# Altium PCB KL25_1.PcbDoc
Units mm, origin at the board's own origin, x right, y up, seen from the top; angles counter-clockwise.
Board outline 152.4 x 101.6 mm, 2 copper layers (Top Layer, Bottom Layer); 44 components, 80 nets, 206 pads, 22 vias.
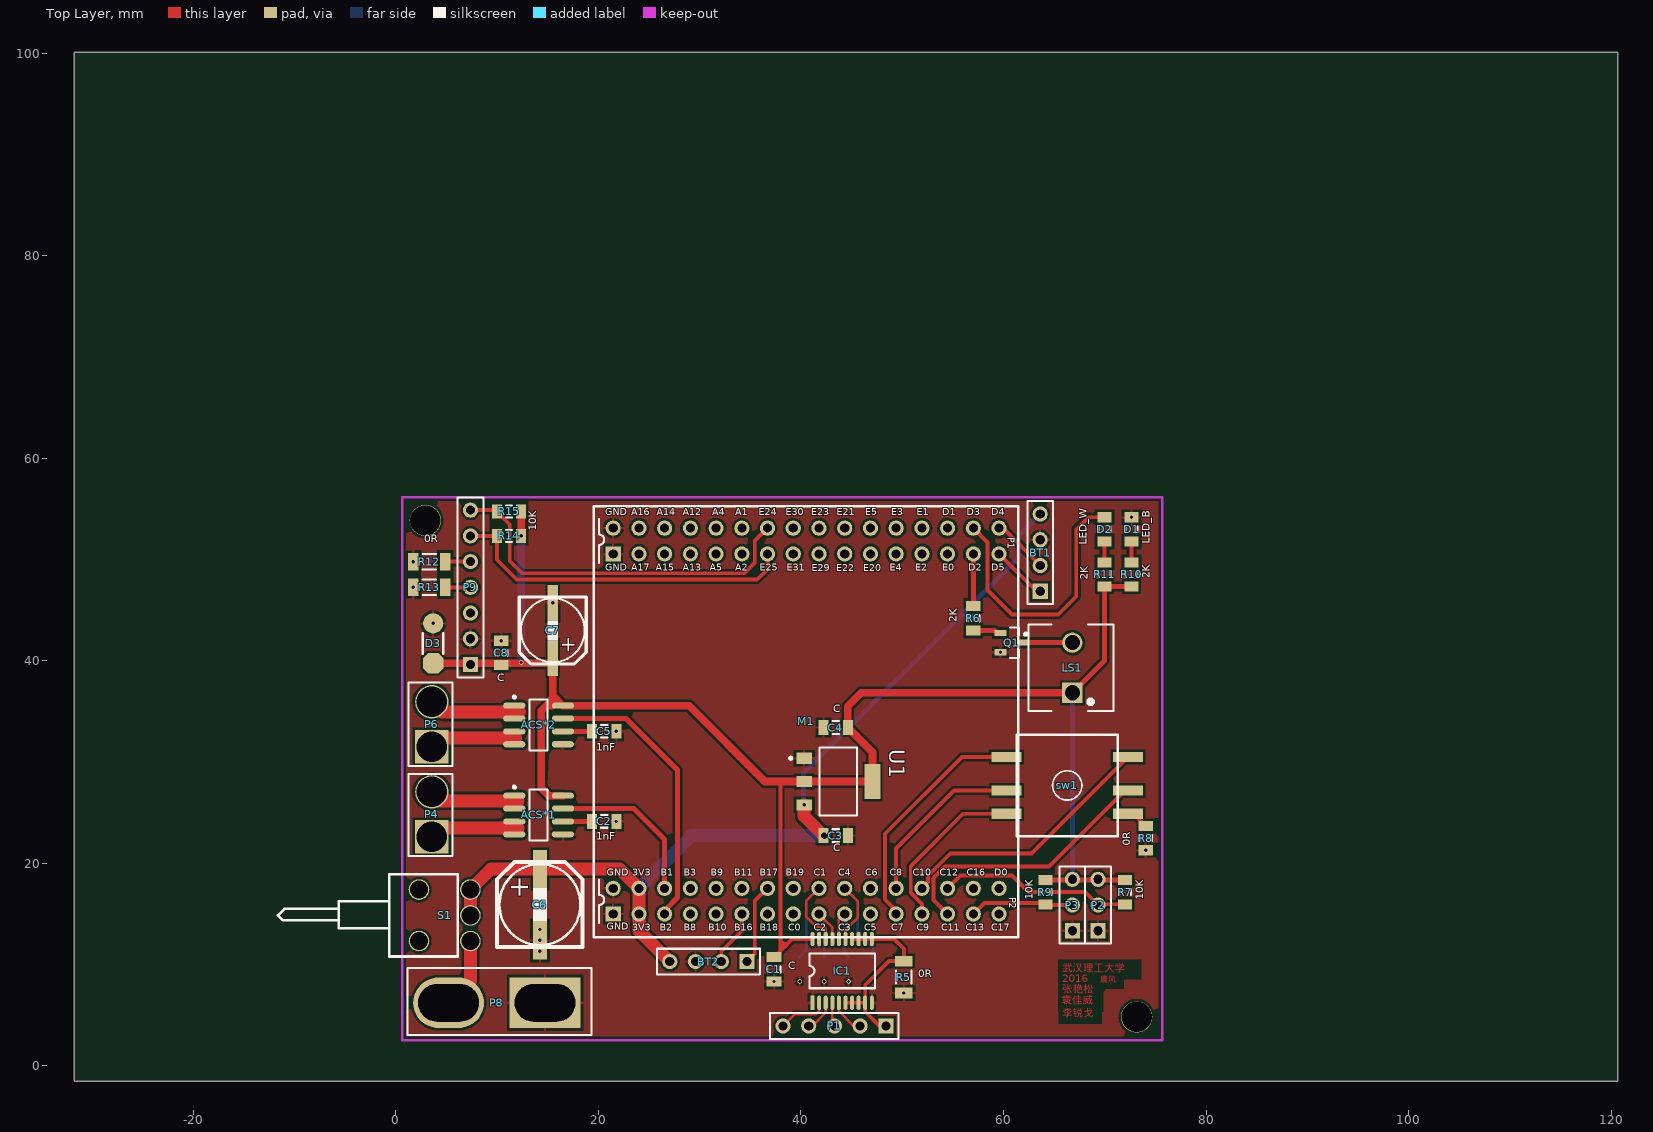
[diagram p0: Top Layer view]
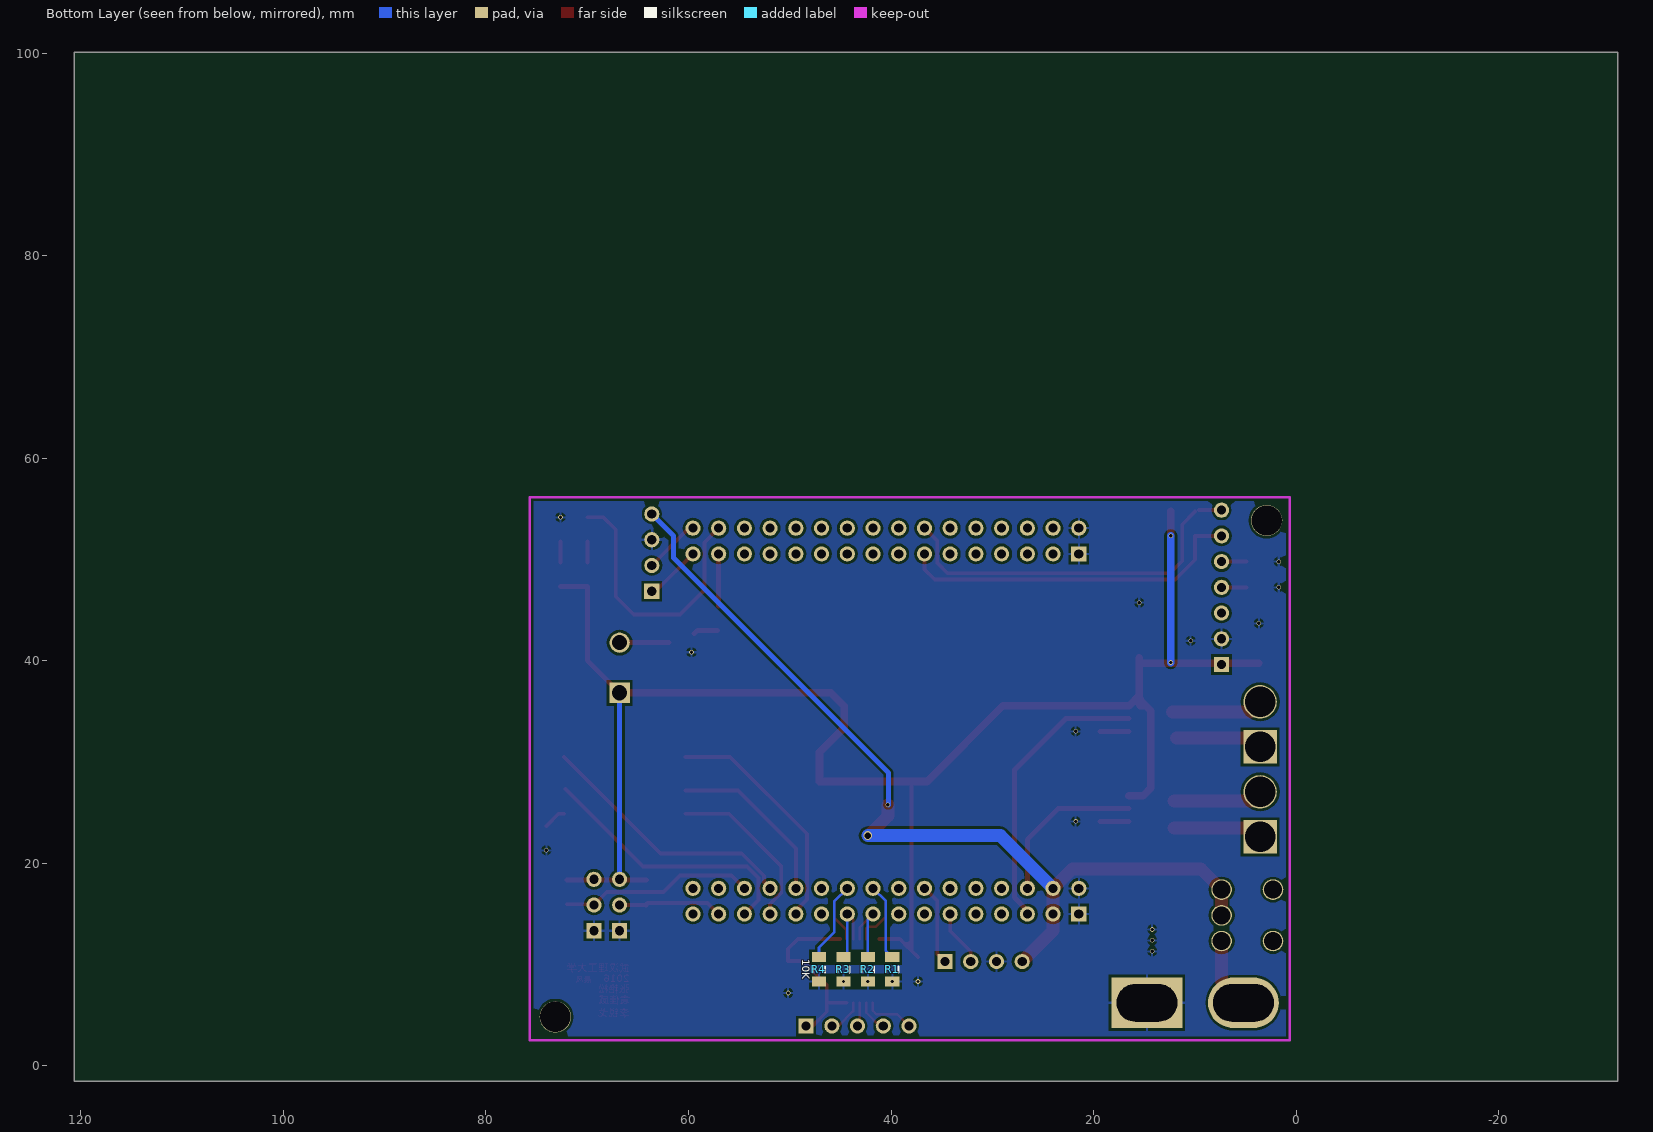
[diagram p1: Bottom Layer view, seen from below]

## Layer stack, top to bottom
Top Layer: signal copper 0.0356
Dielectric: dielectric 0.32, FR-4, Dk 4.8
Bottom Layer: signal copper 0.0356

## Board outline
-31.75,-1.524 120.65,-1.524 120.65,100.076 -31.75,100.076

## Design rules (kind name [scope] priority, off if disabled: settings)
Clearance Clearance_1 [InNet('GND')] p1: gap=0.254
Clearance [All] p2: gap=0.152
PolygonConnect [All] p1: connectstyle=Relief reliefconductorwidth=0.254 reliefentries=4 polygonreliefangle="90 Angle" airgapwidth=0.254
RoutingVias [All] p1: holewidth=0.711 width=1.27 viastyle="Through Hole" minholewidth=0.711 minwidth=1.27 maxholewidth=0.711 maxwidth=1.27
SolderMaskExpansion [All] p1: expansion=0.102
Width [All] p1: maxlimit=1.27 minlimit=0.152 preferedwidth=0.508 minimp=50.000000 maximp=50.000000 favimp=50.000000
28 further rules are at their usual default settings.

## Components (designator, comment, footprint, x,y, rotation, side; value= is the part's Value field where it differs from the comment)
ACS*1 "ACS712 AMPSENSOR" "SOIC1-8N ACS712" 14.097,24.765 r0 top
ACS*2 "ACS712 AMPSENSOR" "SOIC1-8N ACS712" 14.097,33.655 r0 top
BT1 "Header 4" HDR1X4 63.627,46.863 r90 top
BT2 "Header 4" HDR1X4 34.671,10.287 r180 top
C1 "100nF" C2012 37.338,9.525 r270 top
C2 "Cap" C2012 20.574,24.13 r180 top
C3 "Cap" C2012 43.434,22.733 r180 top
C4 "Cap" C2012 43.434,33.401 r0 top
C5 "Cap" C2012 20.574,33.02 r180 top
C6 "Cap Pol1" SMD-EC-F8 14.224,19.431 r270 top
C7 "Cap Pol1" SMD-EC-F6.3 15.494,40.259 r90 top
C8 "100nF" C2012 10.414,40.767 r270 top
D1 "POWER" R2012 72.644,52.959 r90 top
D2 "POWER" R2012 69.977,52.959 r90 top
D3 "1N4729A" "hole-chip diode" 2.667,43.688 r270 top
IC1 "74LVC245" "74LVC245 TSSOP" 41.148,6.223 r90 top
LS1 "Buzzer" ABSM-1574 66.548,32.766 r90 top
M1 "landzo_KL25P80_Module V1.3" "landzo_KL25P80_Module V1.3" 40.513,34.036 r270 top
P1 "Header 5" HDR1X5 48.387,3.937 r180 top
P2 "Header 3" HDR1X3 69.342,13.335 r90 top
P3 "Header 3" HDR1X3 66.802,13.335 r90 top
P4 "Header 2" HDR1X2#1 3.556,23.368 r90 top
P6 "Header 2" HDR1X2#2 3.556,32.512 r90 top
P8 "Header 2" HDR1X2#3 11.684,6.223 r180 top
P9 "Header 7" HDR1X7 7.366,39.624 r90 top
Q1 "QNPN" SOT23_N 60.833,41.783 r0 top
R1 "Res2" R2012 39.878,9.525 r270 bottom
R2 "Res2" R2012 42.291,9.525 r270 bottom
R3 "Res2" R2012 44.704,9.525 r270 bottom
R4 "Res2" R2012 47.117,9.525 r270 bottom
R5 "Res2" 1206(2) 50.165,8.763 r270 top
R6 "Res2" R2012 57.023,44.196 r90 top
R7 "Res2" R2012 72.009,17.145 r270 top
R8 "10k" R2012 74.041,22.479 r90 top
R9 "Res2" R2012 64.135,17.145 r270 top
R10 "2K" R2012 72.644,48.514 r270 top
R11 "2K" R2012 69.977,48.514 r270 top
R12 "Res2" 1206(2) 3.302,49.784 r180 top
R13 "Res2" 1206(2) 3.302,47.244 r180 top
R14 "Res2" R2012 11.176,52.324 r0 top
R15 "Res2" R2012 11.176,54.737 r0 top
S1 "small switch" "small switch" 7.366,12.319 r180 top
sw1 "SW-5" SW-5 66.294,27.686 r0 top
U1 "REG1117" SOT223 43.688,28.067 r270 top

## Footprints (in the part's own frame and the unit in brackets; to place one, negate y for a bottom-side part, rotate by r counter-clockwise, add the part's x,y. Pads: shape width x height; smd on the part's side, far side on the other; paste and mask are expansions set on the pad)
"74LVC245 TSSOP" [mm]
  rect 1.4x0.4 smd: 1(0,0)
  oval 1.4x0.4 smd: 2(0,-0.65) 3(0,-1.3) 4(0,-1.95) 5(0,-2.6) 6(0,-3.25) 7(0,-3.9) 8(0,-4.55) 9(0,-5.2) 10(0,-5.85) 11(6.3,-5.85) 12(6.3,-5.2) 13(6.3,-4.55) 14(6.3,-3.9) 15(6.3,-3.25) 16(6.3,-2.6) 17(6.3,-1.95) 18(6.3,-1.3) 19(6.3,-0.65) 20(6.3,0)
  silkscreen extent 1.43,-6.18 4.87,0.33
1206(2) [mm]
  rect 1.05x1.75 smd: 1(-1.575,0) 2(1.575,0)
  silkscreen extent -0.65,-0.77 0.65,0.77, body extent -1.6,-0.8 1.6,0.8, height 1.6
ABSM-1574 [mm] "Magnetic Transducer Buzzer"
  rect 2x2 hole 1.5: 1A(4.064,-0.254)
  round 2 hole 1.5: 2A(9.017,-0.254)
  silkscreen extent 2.29,-4.32 10.79,4.06
C2012 [mm] "Chip Capacitor, 2-Leads, Body 2.0x1.2mm, IPC Low Density"
  rect 1x1.45 smd: 1(-1.2,0) 2(1.2,0)
  silkscreen extent -0.3,-0.63 0.3,0.63, body extent -0.98,-0.6 1.02,0.6, height 0.5
HDR1X2#1 [mm] "Connector; Header; 2 Position"
  rect 3.3x3.3 hole 3: 1(-0.762,0)
  round 3.3 hole 3: 2(3.683,0)
  silkscreen extent -2.67,-2.03 5.46,2.29
HDR1X2#2 [mm] "Connector; Header; 2 Position"
  rect 3.3x3.3 hole 3: 1(-1.016,0)
  round 3.3 hole 3: 2(3.429,0)
  silkscreen extent -2.92,-2.03 5.33,2.29
HDR1X2#3 [mm] "Connector; Header; 2 Position"
  rect 7x5 hole 3.7 slot 6 at 0 deg: 1(-3.048,0)
  oval 7x5 hole 3.7 slot 6 at 0 deg: 2(6.477,0)
  silkscreen extent -7.62,-3.43 10.54,3.18
HDR1X3 [mm] "Connector; Header; 3 Position"
  rect 1.5x1.5 hole 0.9: 1(0,0)
  round 1.5 hole 0.9: 2(2.54,0) 3(5.08,0)
  silkscreen extent -1.27,-1.27 6.35,1.27, body extent -1.27,-1.27 6.35,1.27, height 7.58
HDR1X4 [mm] "Connector; Header; 4 Position"
  rect 1.5x1.5 hole 0.9: 1(0,0)
  round 1.5 hole 0.9: 2(2.54,0) 3(5.08,0) 4(7.62,0)
  silkscreen extent -1.27,-1.27 8.89,1.27
HDR1X5 [mm] "Connector; Header; 5 Position"
  rect 1.5x1.5 hole 0.9: 1(0,0)
  round 1.5 hole 0.9: 2(2.54,0) 3(5.08,0) 4(7.62,0) 5(10.16,0)
  silkscreen extent -1.27,-1.27 11.43,1.27, body extent -1.27,-1.27 11.43,1.27, height 7.58
HDR1X7 [mm] "Connector; Header; 7 Position"
  rect 1.5x1.5 hole 0.9: 1(0,0)
  round 1.5 hole 0.9: 2(2.54,0) 3(5.08,0) 4(7.62,0) 5(10.16,0) 6(12.7,0) 7(15.24,0)
  silkscreen extent -1.27,-1.27 16.51,1.27
"hole-chip diode" [mm]
  round 2 smd: 1(0,1.016)
  oct 2x2 smd: 2(3.937,1.016)
  silkscreen extent 1,0 3,2
"landzo_KL25P80_Module V1.3" [mm]
  rect 1.5x1.5 hole 0.9: 101(-16.51,-19.05) 201(19.05,-19.05)
  round 1.5 hole 0.9: 102(-16.51,-16.51) 103(-16.51,-13.97) 104(-16.51,-11.43) 105(-16.51,-8.89) 106(-16.51,-6.35) 107(-16.51,-3.81) 108(-16.51,-1.27) 109(-16.51,1.27) 110(-16.51,3.81) 111(-16.51,6.35) 112(-16.51,8.89) 113(-16.51,11.43) 114(-16.51,13.97) 115(-16.51,16.51) 116(-16.51,19.05) 117(-19.05,-19.05) 118(-19.05,-16.51) 119(-19.05,-13.97) 120(-19.05,-11.43) 121(-19.05,-8.89) 122(-19.05,-6.35) 123(-19.05,-3.81) 124(-19.05,-1.27) 125(-19.05,1.27) 126(-19.05,3.81) 127(-19.05,6.35) 128(-19.05,8.89) 129(-19.05,11.43) 130(-19.05,13.97) 131(-19.05,16.51) 132(-19.05,19.05) 202(19.05,-16.51) 203(19.05,-13.97) 204(19.05,-11.43) 205(19.05,-8.89) 206(19.05,-6.35) 207(19.05,-3.81) 208(19.05,-1.27) 209(19.05,1.27) 210(19.05,3.81) 211(19.05,6.35) 212(19.05,8.89) 213(19.05,11.43) 214(19.05,13.97) 215(19.05,16.51) 216(19.05,19.05) 217(16.51,-19.05) 218(16.51,-16.51) 219(16.51,-13.97) 220(16.51,-11.43) 221(16.51,-8.89) 222(16.51,-6.35) 223(16.51,-3.81) 224(16.51,-1.27) 225(16.51,1.27) 226(16.51,3.81) 227(16.51,6.35) 228(16.51,8.89) 229(16.51,11.43) 230(16.51,13.97) 231(16.51,16.51) 232(16.51,19.05)
  silkscreen extent -21.21,-20.96 21.34,20.96
R2012 [mm] "Chip Resistor, 2-Leads, Body 2.0x1.2mm, IPC Low Density"
  rect 1x1.4 smd: 1(-1.2,0) 2(1.2,0)
  silkscreen extent -0.3,-0.6 0.3,0.6, body extent -0.98,-0.6 1.02,0.6, height 0.5
"small switch" [mil]
  round 80 hole 70: 0(200,0) 0(200,-200) 1(0,0) 2(0,-100) 3(0,-200)
  silkscreen extent 50,-260 748,60
SMD-EC-F6.3 [mm]
  rect 3.5x1 smd: 1(0,0) 2(5.475,0)
  silkscreen extent -0.56,-3.31 6.04,3.31
SMD-EC-F8 [mm]
  rect 3.8x1.4 smd: 1(0,0) 2(7.051,0)
  silkscreen extent -0.69,-4.22 7.71,4.2
"SOIC1-8N ACS712" [mm]
  oval 2.2x0.6 smd: 1(-2.4,1.905) 2(-2.4,0.635) 3(-2.4,-0.635) 4(-2.4,-1.905) 5(2.4,-1.905) 6(2.4,-0.635) 7(2.4,0.635) 8(2.4,1.905)
  silkscreen extent -2.52,-2.5 0.9,2.88, body extent -2,-2.5 2,2.5, height 1.75
SOT23_N [mm] "SOT23, 3-Leads, Body 2.9x1.3mm, Pitch 0.95mm, Lead Span 2.3mm - Reverse Pinning, IPC Medium Density"
  rect 1.15x0.6 smd: 1(1.125,0) 2(-1.125,-0.95) 3(-1.125,0.95)
  silkscreen extent -0.2,-1.5 1.48,1.5, body extent -0.7,-1.5 0.7,1.5, height 1.1
SOT223 [mm] "SOT-223/SC-73; 4 Leads; Body 6.7 x 7.3 mm, inc. leads (LxW max)"
  rect 1.1x1.55 smd: 1(-2.3,-3.375) 2(0,-3.375) 3(2.3,-3.375)
  rect 3.45x1.55 smd: 4(0,3.375)
  silkscreen extent -3.35,-4.82 3.35,1.85, body extent -3.25,-3.47 3.25,3.49, height 1.66
SW-5 [mm]
  rect 3x1 smd: 1(-6,2.8) 2(-6,-0.5) 3(-6,-2.8) 4(6,-2.8) 5(6,-0.5) 6(6,2.8)
  silkscreen extent -5,-5 5,5

## Part data
BT1 BT2: "Header, 4-Pin"
C1 C8: library part Cap, "Capacitor"
C2 C3 C4 C5: "贴片电容"
C6 C7: "Polarized Capacitor (Radial)"
D1 D2: library part LED, "Typical INFRARED GaAs LED"
D3: library part "Diode 1N4148", "High Conductance Fast Diode"
LS1: "Magnetic Transducer Buzzer"
P1: "Header, 5-Pin"
P2 P3: "Header, 3-Pin"
P4 P6 P8: "Header, 2-Pin"
P9: "Header, 7-Pin"
Q1: "NPN Bipolar Transistor"
R1 R2 R3 R4 R5 R6 R7 R9 R12 R13 R14 R15: "Resistor"
R8: library part Res, "Resistor of led"
R10 R11: library part Res, "Resistor"
U1: "800mA and 1A Low Dropout Positive Regulator 2.85V, 3.3V, 5V, and Adjustable"

## Free pads (board coordinates)
  round 3.1 hole 3: 0(2.921,53.848) 1(73.152,4.826)

## Via types
v1: diameter 0.457, hole 0.33, Top Layer to Bottom Layer, 21 vias
v2: diameter 0.864, hole 0.635, Top Layer to Bottom Layer, 1 vias

## Nets (pads, with @x,y where several pads share a name; then routed paths per layer and width w, separated by ;. In a path a pad name is that pad's centre, name@x,y a point inside that pad or via, vN(x,y) a via of type N, cw(c..) or ccw(c..) an arc to the next point about the centre after c; other vN are vias at no path point)
3.3V: ACS*1.8 ACS*2.8 C1.1 C4.2 C7.1 C8.2 D3.2 IC1.20 LS1.1A P2.3 P3.3 P9.1 R7.1 R9.1 R10.2 R11.2 R14.2 R15.2 U1.2 U1.4 | length 173.5
  Top Layer w0.381: C1.1 37.973,11.36 ; 37.973,27.89 37.973,12.319 ; 38.989,12.376 38.792,12.179 ; IC1.20 39.136,12.523 38.792,12.179 ; 37.973,11.36 37.973,11.84 ; 37.973,11.36 38.608,11.995 ; 37.973,11.84 ccw(c37.973,12.997) 38.556,11.997 ; 37.973,11.84 37.973,12.319 ; 37.973,12.319 38.077,12.215 ccw(c38.608,12.746) 38.556,11.997 ; 38.556,11.997 ccw(c37.973,12.997) 38.792,12.179 ; 38.556,11.997 ccw(c38.608,12.746) 38.608,11.995 ; 38.608,11.995 38.792,12.179
  Top Layer w0.508: R9.1 R7.1 ; LS1.1A 69.977,40.005 R11.2 R10.2
  Top Layer w0.762: D3.2 14.986,39.751 ; v1(12.376,52.324) R15.2 ; C7.1 15.494,36.563 ; ACS*1.8 15.113,26.67 14.351,27.432 14.351,35.052 14.859,35.56 ; LS1.1A 45.974,36.83 44.634,35.49 C4.2 47.063,30.972 U1.4 U1.2 36.449,28.067 28.956,35.56 ACS*2.8 15.494,36.563 ; 14.859,35.56 15.234,35.935 ccw(c14.606,36.563) 15.494,36.563 ; 14.859,35.56 15.367,35.56 15.494,35.687 15.494,36.563
  Bottom Layer w0.508: P3.3 LS1.1A
  Bottom Layer w0.762: v1(12.376,39.821) v1(12.376,52.324)
5V: BT1.4 BT2.4 C3.2 C6.1 M1.202 M1.218 S1.2 S1.3 U1.3 | length 92
  Top Layer w1.27: S1.2 S1.3 9.398,19.431 C6.1 22.098,19.431 M1.218 M1.202 24.003,13.335 BT2.4 ; v1(40.313,25.767) 40.313,24.654 C3.2
  Bottom Layer w0.508: v1@40.259,25.781 40.259,28.929 61.468,50.138 61.468,52.324 BT1.4
  Bottom Layer w1.27: M1.218 29.21,22.733 v2(42.291,22.733)
ADC1: M1.111
ADC2: M1.126
ADC3: M1.110
ADC4: M1.125
ADC5: ACS*1.7 M1.219 | length 16.1
  Top Layer w0.508: ACS*1.7 23.495,25.4 26.543,22.352 M1.219
ADC6: ACS*2.7 M1.203 | length 28.2
  Top Layer w0.381: M1.203 M1.203@26.543,15.34
  Top Layer w0.508: ACS*2.7 22.733,34.29 27.813,29.21 27.813,16.61 M1.203@26.543,15.34
ADC7: M1.220
"BT RXD": BT1.1 M1.116 | length 5.2
  Top Layer w0.381: M1.116 BT1.1@63.246,46.863
"BT TXD": BT1.2 M1.132 | length 5.6
  Top Layer w0.381: M1.132 59.944,53.086 BT1.2
BZ: M1.115 R6.2 | length 5.1
  Top Layer w0.508: R6.2 M1.115
GND: ACS*1.5 ACS*2.5 BT1.3 BT2.3 C1.2 C2.1 C3.1 C4.1 C5.1 C6.2 C7.2 C8.1 D1.2 D3.1 IC1.1 IC1.10 IC1.19 M1.101 M1.117 M1.201 M1.217 P2.1 P3.1 P8.1 P9.2 Q1.2 R1.2 R2.2 R3.2 R4.2 R5.2 R8.1 R12.2 R13.2 U1.1
  other v1: 50.165,7.188 37.338,8.325 39.878,8.325 42.291,8.325 44.704,8.325 14.224,11.303 14.224,12.38 14.224,13.462 74.041,21.279 21.774,24.13 21.774,33.02 59.708,40.833 10.414,41.967 3.683,43.688 15.494,45.734 1.727,47.244 1.727,49.784 72.644,54.159
I2C0_SCL: M1.123 P9.7 R15.1 | length 36.7
  Top Layer w0.381: P9.7 R15.1@9.595,54.864 ; R15.1 11.246,53.467 11.246,49.841 12.446,48.641 34.417,48.641 35.433,49.657 35.433,51.816 M1.123
I2C0_SDA: M1.107 P9.6 R14.1 | length 34.5
  Top Layer w0.381: P9.6 R14.1 9.976,49.968 11.938,48.006 35.687,48.006 36.703,49.022 M1.107
KEY0: M1.212 sw1.1 | length 23.5
  Top Layer w0.381: M1.212 49.403,15.34 48.31,16.433 48.31,22.91 55.886,30.486 sw1.1
KEY1: M1.228 sw1.2 | length 17.2
  Top Layer w0.381: M1.228 49.403,21.463 55.126,27.186 sw1.2
KEY2: M1.213 sw1.3 | length 16.8
  Top Layer w0.381: M1.213 51.943,15.98 50.85,17.073 50.85,19.735 56.001,24.886 sw1.3
KEY3: M1.214 sw1.5 | length 26.8
  Top Layer w0.381: M1.214 53.086,16.383 53.086,18.542 54.229,19.685 64.481,19.685 sw1.5@72.138,27.342
KEY4: M1.229 sw1.6 | length 26.1
  Top Layer w0.381: M1.229 52.553,18.136 52.553,18.763 54.745,20.955 62.763,20.955 sw1.6
LDCADDR: P9.5 R12.1 | length 2.5
  Top Layer w0.381: R12.1 P9.5
LDCSD: P9.4 R13.1 | length 2.5
  Top Layer w0.381: R13.1 P9.4
LED: D2.2 M1.131 | length 27.1
  Top Layer w0.381: M1.131 58.42,51.689 58.42,46.99 60.833,44.577 65.405,44.577 67.183,46.355 67.183,52.959 68.383,54.159 D2.2
NetACS*1_1: ACS*1.1 ACS*1.2 P4.2 | length 8.9
  Top Layer w1.27: P4.2 4.445,26.162 12.065,26.162
NetACS*1_3: ACS*1.3 ACS*1.4 P4.1 | length 8.9
  Top Layer w1.27: P4.1 4.445,23.495 12.065,23.495
NetACS*1_6: ACS*1.6 C2.2 | length 2.9
  Top Layer w0.508: ACS*1.6 C2.2
NetACS*2_1: ACS*2.1 ACS*2.2 P6.2 | length 9.1
  Top Layer w1.27: P6.2 4.572,34.925 12.205,34.925
NetACS*2_3: ACS*2.3 ACS*2.4 P6.1 | length 8.1
  Top Layer w1.27: P6.1@3.683,32.385 11.811,32.385
NetACS*2_6: ACS*2.6 C5.2 | length 2.9
  Top Layer w0.508: ACS*2.6 C5.2
NetD1_1: D1.1 R10.1 | length 2
  Top Layer w0.381: R10.1 D1.1
NetD2_1: D2.1 R11.1 | length 2
  Top Layer w0.381: R11.1 D2.1
NetIC1_2: IC1.2 P1.5 | length 5
  Top Layer w0.254: P1.5 39.37,5.08 41.444,5.08 41.798,5.434 IC1.2
NetIC1_3: IC1.3 P1.4 | length 3.1
  Top Layer w0.254: P1.4@40.876,3.937 41.148,3.937 42.448,5.237 IC1.3
NetIC1_4: IC1.4 P1.3 | length 2.1
  Top Layer w0.254: P1.3@43.098,4.146 IC1.4
NetIC1_5: IC1.5 P1.2 | length 3.5
  Top Layer w0.254: IC1.5 43.748,5.401 45.212,3.937 P1.2
NetIC1_6: IC1.6 IC1.7 IC1.8 IC1.9 IC1.11 IC1.12 IC1.13 IC1.14 P1.1 R5.1 | length 18.7
  Top Layer w0.381: IC1.6 IC1.7 IC1.8 IC1.9 ; IC1.14 IC1.13 IC1.12 IC1.11 49.199,12.523 50.165,11.557 R5.1 48.692,10.338 46.348,7.994 IC1.9 ; P1.1 47.752,3.937 46.348,5.341 IC1.9
NetLS1_2: LS1.2A Q1.1 | length 4.8
  Top Layer w0.508: Q1.1 LS1.2A
NetQ1_2: Q1.3 R6.1 | length 2.4
  Top Layer w0.508: R6.1@57.15,42.983 59.125,42.983 Q1.3@59.436,42.672
NetR8_2: R8.2 sw1.4 | length 2.2
  Top Layer w0.381: sw1.4 72.834,24.886 R8.2
OLED0: M1.129
OLED1: M1.113
OLED2: M1.128
OLED3: M1.112
OLED4: M1.127
PTA1: M1.122
PTA2: M1.106
PTA4: M1.121
PTA5: M1.105
PTA12: M1.120
PTA13: M1.104
PTA14: M1.119
PTA15: M1.103
PTA16: M1.118
PTA17: M1.102
PTB8: M1.204
PTB9: M1.221
PTB10: M1.205
PTB11: M1.222
PTB16: BT2.2 M1.206 | length 5.5
  Top Layer w0.381: BT2.2 32.131,11.303 34.163,13.335 M1.206
PTB17: BT2.1 M1.223 | length 8.1
  Top Layer w0.381: BT2.1 35.433,11.049 35.433,16.256 M1.223
PTB18: M1.207
PTB19: M1.224
PTC0: M1.208
PTC1: IC1.18 M1.225 R1.1 | length 14.4
  Top Layer w0.254: M1.225 40.513,16.256 40.513,14.732 41.529,13.716 42.291,13.716 42.448,13.559 IC1.18
  Bottom Layer w0.254: R1.1 40.513,11.36 40.513,16.256 M1.225
PTC2: IC1.17 M1.209 R2.1 | length 7.5
  Top Layer w0.254: M1.209 43.098,13.671 IC1.17
  Bottom Layer w0.254: M1.209 42.291,14.478 R2.1
PTC3: IC1.16 M1.210 R3.1 | length 7.1
  Top Layer w0.254: IC1.16 43.748,14.411 M1.210
  Bottom Layer w0.254: M1.210 44.323,11.106 R3.1
PTC4: IC1.15 M1.226 R4.1 | length 14
  Top Layer w0.254: M1.226 45.593,16.256 45.593,14.605 44.398,13.41 IC1.15
  Bottom Layer w0.254: M1.226 45.593,16.256 45.593,13.208 47.117,11.684 R4.1
PTC5: M1.211
PTC6: M1.227
PTC12: M1.230 P2.2 R7.2 | length 19.2
  Top Layer w0.381: M1.230 55.753,18.796 60.833,18.796 62.484,17.145 68.072,17.145 P2.2 ; P2.2@69.412,15.945 R7.2
PTC13: M1.215 P3.2 R9.2 | length 10.3
  Top Layer w0.381: M1.215 58.116,16.079 64.001,16.079 R9.2 ; R9.2@64.205,15.875 P3.2
  Top Layer w0.508: R9.2 R9.2@64.205,15.875
PTC16: M1.231
PTC17: M1.216
PTD0: M1.232
PTD1: M1.130
PTE0: M1.114
PTE29: M1.109
PTE30: M1.124
PTE31: M1.108
VBAT: P8.2 S1.1 | length 3.9
  Top Layer w1.27: P8.2@7.366,8.382 S1.1
pads on no net: P9.3 S1.0

## Polygon pours and split planes (outlines as drawn)
GND on Top Layer "Top Layer-GND" (solid, remove dead copper, pour order 2): 0.635,56.134 0.635,2.54 25.781,2.54 75.692,2.54 75.692,13.081 75.692,56.134 49.149,56.134
GND on Bottom Layer "Top Layer-GND" (solid, remove dead copper, pour order 4): 1.905,56.134 0.635,56.134 0.635,54.991 0.635,2.54 11.557,2.54 75.692,2.54 75.692,4.318 75.692,56.134 60.833,56.134

## Keep-outs
Keep-Out Layer:
  lines w0.254: 0.635,2.54 75.692,2.54 75.692,56.134 0.635,56.134 0.635,2.54

## Other copper
Top Layer:
  text "武汉理工大学" at 65.781,9.036 h1.27
  text "晨风" at 69.559,8.072 h1
  text "2016" at 65.806,7.986 h1.27 r0.25
  text "张艳松" at 65.806,6.961 h1.27
  text "袁佳威" at 65.756,5.861 h1.27
  text "李锐戈" at 65.781,4.611 h1.27

## Silkscreen, mask and mechanical layers (free items; w line width, h text height)
Top Overlay:
  text "10K" at 14.097,52.832 h1.27 r90
  text "LED_B" at 74.676,51.562 h1.27 r90
  text "0R" at 2.794,51.435 h1.27
  text "LED_W" at 68.453,51.435 h1.27 r90
  text "2K" at 74.676,48.133 h1.27 r90
  text "2K" at 68.58,48.006 h1.27 r90
  text "2K" at 55.626,43.815 h1.27 r90
  text "C" at 10.033,37.719 h1.27
  text "C" at 43.18,34.671 h1.27
  text "1nF" at 19.812,30.861 h1.27
  text "1nF" at 19.812,22.098 h1.27
  text "0R" at 72.771,21.717 h1.27 r90
  text "C" at 43.18,20.955 h1.27
  text "10K" at 63.119,16.383 h1.27 r90
  text "10K" at 74.041,16.383 h1.27 r90
  text "C" at 38.735,9.271 h1.27
  text "0R" at 51.562,8.509 h1.27
Bottom Overlay:
  text "10K" at 49.022,10.541 h1.27 r90

## Text inside footprints (layer, text, board x,y; h text height)
C6: Top Overlay "+" at 11.406,18.791 h2 r270
C7: Top Overlay "+" at 17.658,40.689 h1.5 r90
M1: Top Overlay "D0" at 59.095,18.501 h1.14; Top Overlay "C16" at 56.388,18.542 h1.14; Top Overlay "C12" at 53.721,18.542 h1.14; Top Overlay "C10" at 51.054,18.542 h1.14; Top Overlay "C8" at 48.768,18.542 h1.14; Top Overlay "C6" at 46.355,18.542 h1.14; Top Overlay "C4" at 43.688,18.542 h1.14; Top Overlay "GND" at 20.828,18.542 h1.14; Top Overlay "3V3" at 23.368,18.542 h1.14; Top Overlay "B1" at 26.162,18.542 h1.14; Top Overlay "B3" at 28.448,18.542 h1.14; Top Overlay "B9" at 31.115,18.542 h1.14; Top Overlay "B11" at 33.401,18.542 h1.14; Top Overlay "B17" at 35.941,18.542 h1.14; Top Overlay "B19" at 38.481,18.542 h1.14; Top Overlay "C1" at 41.275,18.542 h1.14; Top Overlay "E2" at 51.308,48.641 h1.14; Top Overlay "E4" at 48.768,48.641 h1.14; Top Overlay "A16" at 23.241,54.102 h1.14; Top Overlay "A17" at 23.241,48.641 h1.14; Top Overlay "A12" at 28.321,54.102 h1.14; Top Overlay "A4" at 31.242,54.102 h1.14; Top Overlay "GND" at 20.701,54.102 h1.14; Top Overlay "A1" at 33.528,54.102 h1.14; Top Overlay "E25" at 35.941,48.641 h1.14; Top Overlay "E24" at 35.814,54.102 h1.14; Top Overlay "E31" at 38.608,48.641 h1.14; Top Overlay "E30" at 38.481,54.102 h1.14; Top Overlay "E23" at 41.021,54.102 h1.14; Top Overlay "E29" at 41.061,48.6 h1.14; Top Overlay "E22" at 43.474,48.6 h1.14; Top Overlay "E21" at 43.561,54.102 h1.14; Top Overlay "E20" at 46.141,48.6 h1.14; Top Overlay "D4" at 58.801,54.102 h1.14; Top Overlay "C17" at 58.801,13.081 h1.14; Top Overlay "C13" at 56.261,13.081 h1.14; Top Overlay "C11" at 53.848,13.081 h1.14; Top Overlay "C7" at 48.895,13.081 h1.14; Top Overlay "C5" at 46.228,13.081 h1.14; Top Overlay "C2" at 41.275,13.081 h1.14; Top Overlay "C0" at 38.735,13.081 h1.14; Top Overlay "B18" at 35.941,13.081 h1.14; Top Overlay "B16" at 33.401,13.081 h1.14; Top Overlay "B10" at 30.861,13.081 h1.14; Top Overlay "B8" at 28.448,13.081 h1.14; Top Overlay "B2" at 26.035,13.081 h1.14; Top Overlay "3V3" at 23.368,13.081 h1.14; Top Overlay "A13" at 28.321,48.641 h1.14; Top Overlay "A14" at 25.781,54.102 h1.14; Top Overlay "A15" at 25.654,48.641 h1.14; Top Overlay "A5" at 30.988,48.641 h1.14; Top Overlay "A2" at 33.528,48.641 h1.14; Top Overlay "GND" at 20.701,48.641 h1.14; Top Overlay "E5" at 46.355,54.102 h1.14; Top Overlay "E3" at 48.895,54.102 h1.14; Top Overlay "E1" at 51.435,54.102 h1.14; Top Overlay "D5" at 58.801,48.641 h1.14; Top Overlay "D3" at 56.388,54.102 h1.14; Top Overlay "D2" at 56.515,48.641 h1.14; Top Overlay "D1" at 53.975,54.102 h1.14; Top Overlay "E0" at 53.975,48.641 h1.14; Top Overlay "C3" at 43.688,13.081 h1.14; Top Overlay "GND" at 20.828,13.208 h1.14; Top Overlay "C9" at 51.435,13.081 h1.14; Top Overlay "P1" at 60.198,52.197 h1.14 r270; Top Overlay "P2" at 60.325,16.637 h1.14 r270